# Altium PCB MB1189.PcbDoc (part 3 of 3)
Units mil, origin at the board's own origin, x right, y up, seen from the top; angles counter-clockwise.
Board outline 3826.77 x 2234.25 mil, 6 copper layers (Top Layer, GND_TOP, Internal Signal 1, VCC, Internal Signal 2, Bottom Layer), stack 62.65 mil thick; 150 components, 157 nets, 740 pads, 457 vias.
Unrouted connection lines stored in the file: 6.
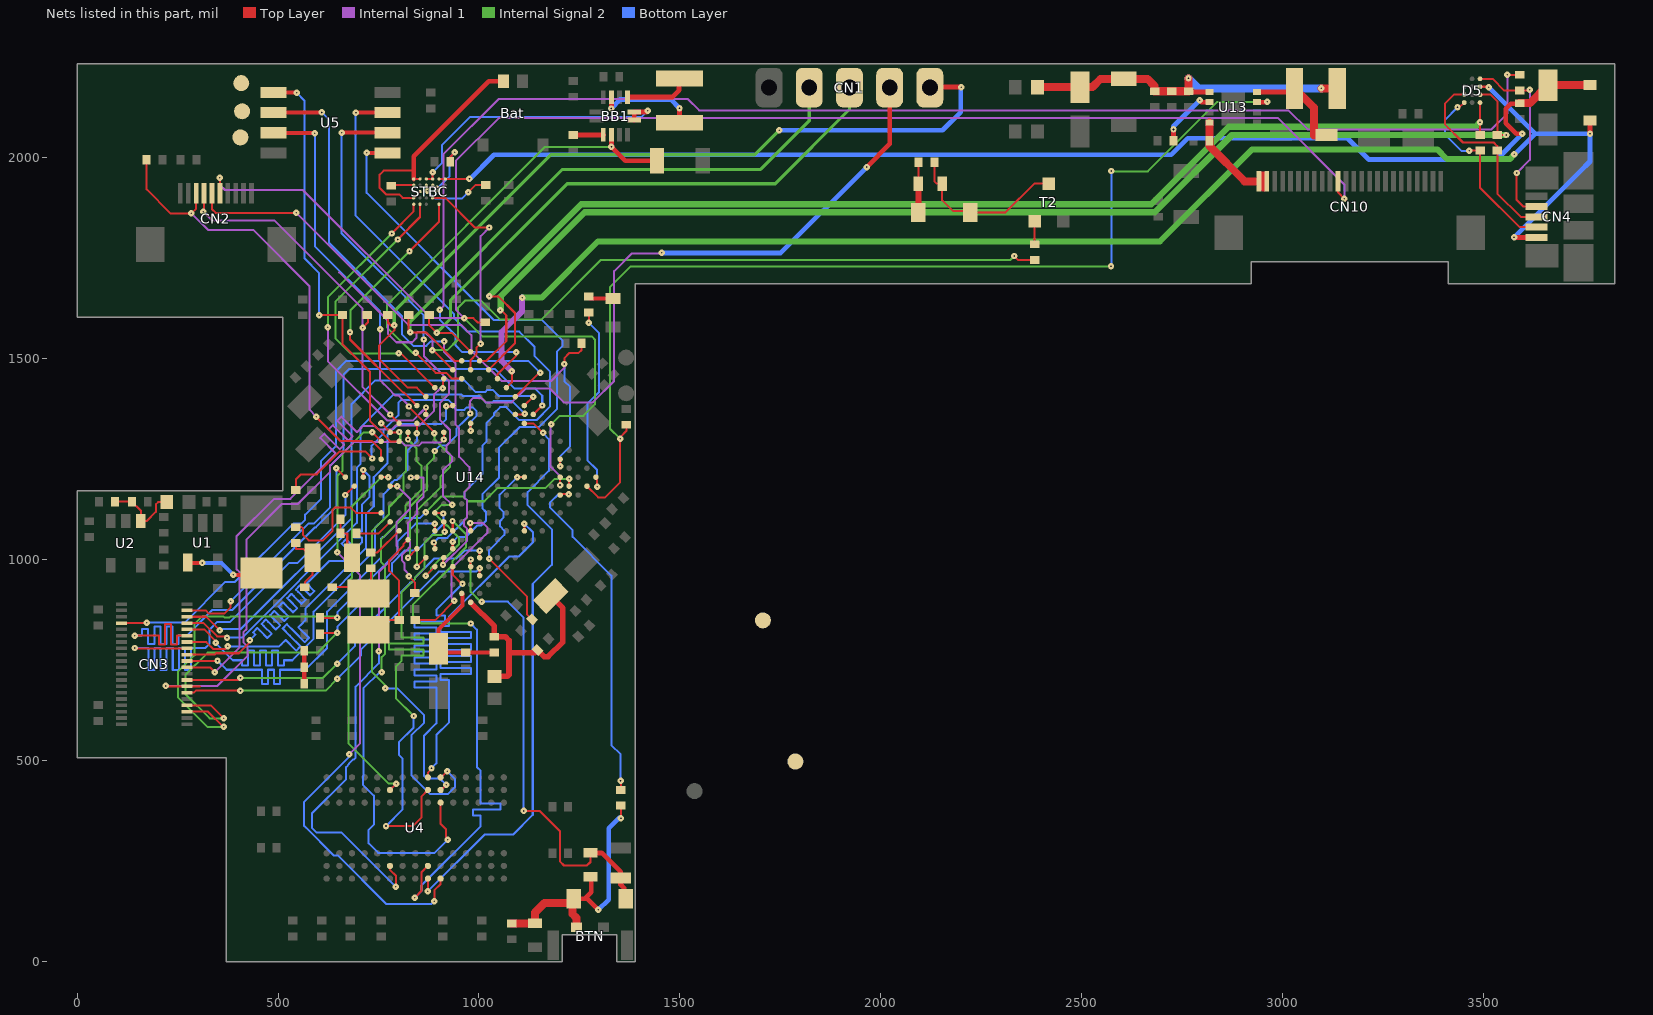
[diagram p7: the nets of this part, all layers, seen from the top]

## Via types
v1: diameter 16, hole 4, Top Layer to Bottom Layer, 457 vias

## Nets (pads, with @x,y where several pads share a name; then routed paths per layer and width w, separated by ;. In a path a pad name is that pad's centre, name@x,y a point inside that pad or via, vN(x,y) a via of type N, cw(c..) or ccw(c..) an arc to the next point about the centre after c; other vN are vias at no path point) (continued)
HREF: CN3.15 U14.N4 | length 893.2
  Top Layer w5: CN3.15@273.82,700.79 401.25,700.79 v1(406.5,706.04) ; U14.N4@1001.6,1005.27 1001.6,1015.01 v1(1001.6,1023.01)
  Internal Signal 2 w5: v1(406.5,706.04) 611.94,706.04 v1(647.64,741.73)
  Bottom Layer w5: v1(647.64,741.73) 691.93,786.02 691.93,806.6 828.54,943.21 832.25,943.21 841.33,952.29 841.33,956 888.08,1002.75 943.7,1002.75 963.96,1023.01 v1(1001.6,1023.01)
I2C1_SCL: CN2.4 R140.2 U14.A7 | length 903.9
  Top Layer w5: v1(313.98,1866.14) 315.94,1868.11 CN2.4@315.94,1912.4 ; v1(710.63,1577.76) 723.43,1590.55 723.43,1606.97 R140.2@721.45,1608.94 ; v1(778.89,1361.61) U14.A7@801.16,1339.34
  Internal Signal 1 w5: v1(313.98,1866.14) 335.63,1844.49 490.88,1844.49 710.63,1624.74 v1(710.63,1577.76) 710.63,1429.87 v1(778.89,1361.61)
I2C2_SDA: CN2.3 R142.2 U14.B4 | length 1185.9
  Top Layer w5: R142.2@172.92,1996.07 172.92,1921.57 232.28,1862.2 v1(284.45,1862.2) 296.26,1874.02 CN2.3@296.26,1912.4 ; v1(595.5,1356.37) 595.5,1355.29 655.51,1295.28 734.25,1295.28 756.62,1272.91 U14.B4@756.62,1250.25
  Internal Signal 1 w5: v1(284.45,1862.2) 325.79,1820.87 437.99,1820.87 578.74,1680.12 578.74,1375.04 577.78,1374.08 v1(595.5,1356.37)
K: CN10.1 CN10.2 R58.2 U13.4 | length 267.7
  Top Layer w20: U13.4@2817.91,2087.6 2817.91,2029.53 2905.51,1941.93 CN10.1@2940.94,1941.93 2949.8,1950.79 2949.8,1956.69 2950.79,1956.69 2950.79,1927.17 2951.77,1926.18
LCD_BL_CTRL: R118.1 U13.7 U14.R14 | length 2638.9
  Top Layer w5: U14.R14@1268.85,1183.44 1296.78,1155.51 1313.98,1155.51 1351.38,1192.91 v1(1351.38,1301.18) 1351.38,1305.12 1367.13,1320.87 R118.1@1367.13,1335.94
  Top Layer w12: U13.7@2936.02,2138.78 2960.63,2138.78 v1(2961.61,2139.76)
  Internal Signal 2 w5: v1(1351.38,1301.18) 1325.79,1326.77 1325.79,1678.15 1377.95,1730.32 v1(2572.83,1730.32) ; v1(2573.82,1967.52) 2574.8,1966.54 2664.37,1966.54 2837.6,2139.76 v1(2961.61,2139.76)
  Bottom Layer w5: v1(2572.83,1730.32) 2573.82,1731.3 v1(2573.82,1967.52)
LCD_INT: CN2.5 R36.2 U14.M14 | length 1512.5
  Top Layer w5: CN2.5@335.63,1912.4 335.63,1872.05 344.49,1863.19 v1(545.28,1863.19) ; v1(1202.04,1232.51) 1202.04,1240.51 U14.M14@1202.04,1250.25 ; v1(1212.66,1487.28) 1212.66,1501.91 1212.6,1501.97 1225.39,1514.76 1248.03,1514.76 1255.23,1521.96 R36.2@1255.23,1539.37
  Internal Signal 1 w5: v1(545.28,1863.19) 823.82,1584.65 955.71,1584.65 981.3,1559.06 981.3,1519.95 1056.36,1444.88 1180.12,1444.88 1212.66,1477.42 v1(1212.66,1487.28)
  Bottom Layer w5: v1(1202.04,1232.51) 1202.04,1257.16 1227.11,1282.23 1227.11,1430.37 1212.66,1444.82 v1(1212.66,1487.28)
LCD_RST: CN2.6 CN10.11 R34.2 U14.N13 | length 4488.5
  Top Layer w5: CN2.6@355.31,1912.4 v1(355.31,1950.79) ; v1@961.62,1603.34 v1(963.58,1601.38) 986.22,1601.38 997.05,1590.55 1015.07,1590.55 R34.2@1015.74,1591.23 ; v1(1201.77,1186.02) 1202.04,1186.29 U14.N13@1202.04,1205.71 ; CN10.11@3137.79,1941.93 3137.79,1914.37 v1(3153.54,1898.62)
  Internal Signal 1 w5: v1(355.31,1950.79) 355.31,1933.07 368.11,1920.28 562.01,1920.28 880.91,1601.38 v1(963.58,1601.38) 942.47,1622.49 942.47,1992.57 1048.77,2098.86 2988.63,2098.86 3153.54,1933.95 v1(3153.54,1898.62) ; v1(1180.38,1337.34) 1178.21,1335.16 1178.21,1231.3 1201.77,1207.73 v1(1201.77,1186.02)
  Internal Signal 2 w5: v1(963.58,1601.38) 1009.84,1555.12 1281.5,1555.12 1288.39,1548.23 1288.39,1386.81 1259.84,1358.27 1201.31,1358.27 v1(1180.38,1337.34)
LED1: R2.1 U14.R15 | length 490.5
  Top Layer w5: v1(1273.62,1589.57) R2.1@1273.63,1615.47 ; U14.R15@1291.13,1205.71 1294.29,1202.54 v1(1294.29,1182.09)
  Bottom Layer w5: v1(1273.62,1589.57) 1298.23,1564.96 1298.23,1416.34 1269.69,1387.8 1269.69,1248.03 1294.29,1223.43 v1(1294.29,1182.09)
MICROAB_N: D5.D3 R160.2 U14.C15 | length 2974.9
  Top Layer w5: U14.C15@1023.87,1472.96 1089.62,1538.71 1089.62,1614.17 1048.29,1655.51 v1(1025.59,1655.51)
  Top Layer w6: R160.2@3491.15,2057.4 v1(3491.15,2088.58) D5.D3@3491.14,2137.8
  Internal Signal 2 w16: v1(1025.59,1655.51) 1254.92,1884.84 2673.23,1884.84 2866.14,2077.76 3480.32,2077.76 v1(3491.15,2088.58)
MICROAB_P: D5.C3 R159.2 U14.B15 | length 3029.4
  Top Layer w5: U14.B15@1001.6,1495.23 1018.85,1495.23 1067.91,1544.29 1067.91,1608.37 1055.22,1621.06 v1(1053.15,1621.06) ; D5.C3@3491.14,2157.48 3517.72,2157.48 3534.45,2140.74 R159.2@3534.45,2057.4 3555.79,2057.4 v1(3556.1,2057.09)
  Internal Signal 2 w16: v1(1053.15,1621.06) 1054.13,1622.05 1054.13,1655.77 1263.21,1864.84 2681.51,1864.84 2873.76,2057.09 v1(3556.1,2057.09)
NetBAT_1: Bat.1 STBC.A2 STBC.A5 STBC.B3 STBC.B5 | length 612
  Top Layer w4: STBC.A2@837.6,1900.59 STBC.B3@853.35,1916.34
  Top Layer w5: STBC.A2@837.6,1900.59 810.04,1900.59 801.18,1909.45 768.7,1909.45 752.95,1925.2 752.95,1958.66 762.8,1968.5 837.6,1968.5 ; STBC.A5@837.6,1947.83 STBC.B5@853.35,1947.83
  Top Layer w12: STBC.A5@837.6,1947.83 837.6,1968.5 837.6,2003.94 1024.49,2190.83 Bat.1@1061.02,2190.83
NetBB1_1: BB1.1 L6.2 | length 165.4
  Top Layer w12: BB1.1@1369.57,2151.33 1481.06,2151.33 1498.03,2168.31 1498.03,2196.85 L6.2@1499.02,2197.83
NetBB1_3: BB1.3 L6.1 | length 253.7
  Top Layer w12: v1(1328.74,2123.03) 1329.57,2123.86 BB1.3@1329.57,2151.33 ; L6.1@1499.02,2087.6 v1(1499.02,2124.02)
  Bottom Layer w12: v1(1328.74,2123.03) 1351.38,2145.67 1477.36,2145.67 v1(1499.02,2124.02)
NetBB1_7: BB1.7 C1.1 | length 74.4
  Top Layer w12: C1.1@1235.24,2057.46 1309.44,2057.46 BB1.7@1309.57,2057.33
NetBB1_11: BB1.11 BB1.12 STBC.C5 STBC.D5 | length 711.9
  Top Layer w5: STBC.C5@869.09,1947.83 STBC.D5@884.84,1947.83 v1(884.84,1964.57)
  Top Layer w12: BB1.11@1386.57,2094.33 BB1.12@1386.57,2114.33 1417.48,2114.33 v1(1420.28,2117.13)
  Bottom Layer w5: v1(884.84,1964.57) 908.46,1988.19 908.46,2032.48 978.35,2102.36 1405.51,2102.36 v1(1420.28,2117.13)
NetBTN_1: BTN.1 D2.1 R8.1 R10.1 R18.1 R19.1 | length 688
  Top Layer w5: v1@1353.35,357.28 R8.1@1353.35,388.11
  Top Layer w12: D2.1@1236.22,156.5 1262.8,156.5 ; R18.1@1277.56,211.61 1279.53,209.65 1279.53,173.23 1262.8,156.5 ; v1(1297.24,128.94) 1269.68,156.5 1262.8,156.5
  Top Layer w20: R19.1@1081.69,95.16 1139.45,95.16 R10.1@1139.76,95.47 1139.76,122.05 1163.39,145.67 1225.39,145.67 D2.1@1232.28,152.56 ; D2.1@1236.22,156.5 D2.1@1232.28,152.56 ; BTN.1@1243.11,85.16 1243.11,108.27 1232.28,119.09 D2.1@1232.28,152.56
  Bottom Layer w12: v1(1297.24,128.94) 1322.83,154.53 1322.83,331.69 1348.43,357.28 v1(1353.35,357.28)
NetC3_1: C3.1 R6.1 R7.2 | length 82.2
  Top Layer w12: R6.1@565.27,690.94 C3.1@565.27,732.03 R7.2@565.27,773.12
NetC14_1: C14.1 D1.1 T2.3 VM.2 | length 418.9
  Top Layer w5: C14.1@2133.24,1989.17 2133.24,1941.56 2138.78,1936.02 VM.2@2152.56,1936.02 2152.56,1894.69 2179.13,1868.11 2218.5,1868.11 D1.1@2222.44,1864.17 2310.04,1864.17 2381.97,1936.1 T2.3@2418.31,1936.1 T2.3@2418.23,1936.02
NetC14_2: C14.2 D1.2 VM.1 | length 125.2
  Top Layer w5: VM.1@2093.5,1936.02 2093.87,1936.39 C14.2@2093.87,1989.17
  Top Layer w15: D1.2@2093.44,1864.17 2093.5,1864.24 VM.1@2093.5,1936.02
NetC21_1: C21.1 C22.1 L7.1 U2.1 | length 195.4
  Top Layer w5: C22.1@93.87,1144.69 C21.1@136.44,1144.69 158.46,1122.66 U2.1@158.46,1096.46 173.23,1096.46 195.87,1119.09 195.87,1137.8 201.77,1143.7 L7.1@223.43,1143.7
NetC76_1: C76.1 U14.L11 | length 462.1
  Top Layer w5: v1(1025.32,1002.89) 1120.08,908.13 1120.08,863.71 C76.1@1132.15,851.64 ; v1(1095.21,1205.71) 1103.21,1205.71 U14.L11@1112.96,1205.71
  Bottom Layer w5: v1(1025.32,1002.89) 1025.32,1024.11 1062.99,1061.78 1062.99,1072.63 1052.56,1083.06 1052.56,1096.6 1061.64,1105.68 1061.64,1118.52 1051.48,1128.68 1051.48,1161.98 v1(1095.21,1205.71)
NetC85_1: C85.1 R131.2 X2.2 | length 162
  Top Layer w5: C85.1@634.84,931.72 710.02,931.72 X2.2@725.39,916.34 731.29,922.24 R131.2@731.29,979.02
NetC93_1: C93.1 R132.1 X3.1 | length 145.8
  Top Layer w5: R132.1@544.3,1041.65 544.3,1027.55 545.28,1026.57 563.98,1026.57 X3.1@585.63,1004.92 585.63,962.6 566.93,943.9 C93.1@566.93,931.72
NetC94_1: C94.1 R133.1 X3.2 | length 117.2
  Top Layer w5: C94.1@655.88,1101.38 655.88,1066 R133.1@655.82,1065.94 671.26,1065.94 672.24,1064.96 672.24,1016.73 X3.2@684.06,1004.92
NetC96_1: C96.1 U14.E11 | length 709
  Top Layer w5: C96.1@544.29,1173.6 544.29,1199.8 557.09,1212.6 596.46,1212.6 653.54,1269.69 716.63,1269.69 v1(734.29,1252.03) ; v1(979.33,1321.59) U14.E11@979.33,1339.34
  Bottom Layer w5: v1(734.29,1252.03) 732.78,1253.54 732.78,1283.96 762.12,1313.3 762.12,1322.16 799.21,1359.25 799.21,1390.75 805.92,1397.46 924.77,1397.46 933.85,1388.38 933.85,1383.08 943.9,1373.03 950.51,1373.03 950.64,1372.9 963.48,1372.9 970.06,1379.49 970.76,1378.79 971.47,1379.49 984.31,1379.49 993.39,1370.41 993.39,1357.57 979.33,1343.51 v1(979.33,1321.59)
NetCN1_1: CN1.1 R3.1 U14.A10 | length 2082.4
  Top Layer w5: R3.1@773.63,1608.94 773.63,1590.55 780.51,1583.66 v1(789.37,1583.66) 789.37,1570.87 750.98,1532.48 750.98,1500 822.56,1428.42 845.7,1428.42 U14.A10@867.97,1406.15
  Top Layer w12: CN1.1@2122.05,2175.2 2123.03,2176.18 v1(2199.8,2176.18)
  Internal Signal 2 w8: v1(789.37,1583.66) 789.37,1618.11 1179.13,2007.87 1686.02,2007.87 v1(1747.05,2068.9)
  Bottom Layer w12: v1(1747.05,2068.9) 2153.54,2068.9 2198.82,2114.17 2198.82,2175.2 v1(2199.8,2176.18)
NetCN4_2: CN4.2 D5.D1 R160.1 | length 481.8
  Top Layer w5: v1(3435.04,2125.98) 3439.96,2125.98 D5.D1@3451.77,2137.8 D5.D1@3452.08,2137.49 ; v1(3464.57,2017.72) 3464.88,2018.03 R160.1@3491.15,2018.03 3491.15,1926.19 3589.57,1827.76 CN4.2@3631.5,1827.76
  Top Layer w6.59: CN4.2@3629.53,1825.79 CN4.2@3631.5,1827.76
  Bottom Layer w5: v1(3435.04,2125.98) 3404.53,2095.47 3404.53,2058.07 3444.88,2017.72 v1(3464.57,2017.72)
NetCN4_3: CN4.3 D5.C1 R159.1 | length 501.3
  Top Layer w5: D5.C1@3451.77,2157.48 3426.18,2157.48 3403.54,2134.84 3403.54,2083.66 3448.82,2038.39 3525.59,2038.39 3534.45,2029.52 R159.1@3534.45,2018.03 3534.45,1911.41 3592.52,1853.35 CN4.3@3631.5,1853.35
NetCN4_4: CN4.4 D5.A3 R161.1 | length 481.8
  Top Layer w5: D5.A3@3491.14,2196.85 3522.64,2196.85 3551.86,2167.63 R161.1@3589.57,2167.63 3613.5,2167.63 v1(3615.16,2169.29) ; v1(3582.68,1962.6) 3581.69,1961.61 3581.69,1896.65 3599.41,1878.94 CN4.4@3631.5,1878.94
  Top Layer w8: CN4.4@3630.51,1879.92 CN4.4@3631.5,1878.94
  Internal Signal 1 w5: v1(3582.68,1962.6) 3615.16,1995.08 v1(3615.16,2169.29)
NetL3_1: L3.1 U1.4 | length 197.7
  Top Layer w10: U1.4@275.59,993.11 276.57,992.13 v1(311.02,992.13) ; v1(388.78,962.6) 453.74,962.6 L3.1@458.66,967.52
  Bottom Layer w10: v1(311.02,992.13) 359.25,992.13 v1(388.78,962.6)
NetL4_2: L4.2 U13.8 Z1.1 | length 234.3
  Top Layer w12: U13.8@2936.02,2164.37 3020.67,2164.37 L4.2@3029.53,2173.23
  Top Layer w20: L4.2@3029.53,2173.23 3077.76,2125 3077.76,2056.1
NetLD1_2: LD1.2 R2.2 | length 61.8
  Top Layer w10: R2.2@1273.63,1654.84 1277.87,1650.59 LD1.2@1333.66,1650.59
NetR8_2: R8.2 U14.P12 | length 865.3
  Top Layer w5: U14.P12@1202.04,1161.17 1204.42,1163.55 v1(1223.32,1163.55) ; v1(1352.36,449.8) 1353.35,448.81 R8.2@1353.35,427.48
  Bottom Layer w5: v1(1223.32,1163.55) 1198,1163.55 1177.17,1142.72 1177.17,1129.92 1233.27,1073.82 1233.27,1057.09 1329.72,960.63 1329.72,538.39 1352.36,515.75 v1(1352.36,449.8)
NetR31_1: R31.1 T2.1 | length 57.2
  Top Layer w5: R31.1@2382.87,1785.12 T2.1@2382.87,1842.36
NetR59_1: R59.1 U13.2 | length 154.1
  Top Layer w12: R59.1@2728.04,2043.3 2728.35,2043.61 v1(2728.35,2070.87) ; v1(2793.31,2143.7) 2798.23,2138.78 U13.2@2817.91,2138.78
  Bottom Layer w12: v1(2728.35,2070.87) 2728.35,2078.74 v1(2793.31,2143.7)
NetR122_2: R122.2 U14.L5 | length 407.5
  Top Layer w5: R122.2@841.54,849.72 891.06,849.72 v1(938.98,897.64) ; v1(978.35,1091.54) 978.35,1082.81 979.33,1081.83 U14.L5@979.33,1072.08
  Internal Signal 1 w5: v1(938.98,897.64) 931.1,905.51 931.1,977.36 1008.12,1054.38 1008.39,1054.38 1020.67,1066.66 1020.67,1080.71 1009.84,1091.54 v1(978.35,1091.54)
NetR149_1: R149.1 U14.E5 | length 374.2
  Top Layer w5: v1(825.83,958.71) 840.55,943.99 R149.1@840.55,917.01 ; v1(830.75,1204.78) 844.78,1204.78 U14.E5@845.7,1205.71
  Internal Signal 1 w5: v1(825.83,958.71) 825.83,964.28 814.71,975.39 814.71,991.66 807.93,998.44 807.93,1011.69 819.27,1023.02 828.35,1032.1 828.35,1044.94 823.82,1049.47 823.82,1092.52 845.47,1114.17 845.47,1140.75 862.15,1157.42 862.15,1204.78 v1(830.75,1204.78)
NetR161_2: R161.2 U14.D15 | length 3618.1
  Top Layer w5: U14.D15@1046.14,1450.69 1046.14,1461.5 1092.57,1507.93 v1(1092.57,1516.81) ; v1(3559.06,2206.69) 3559.37,2207 R161.2@3589.57,2207
  Internal Signal 1 w5: v1(902.56,1622.05) 911.42,1630.91 911.42,2008.86 1049.21,2146.65 1519.69,2146.65 1547.85,2118.48 3014.39,2118.48 3062.01,2070.87 3519.69,2070.87 3559.06,2110.24 v1(3559.06,2206.69)
  Bottom Layer w5: v1(902.56,1622.05) 902.56,1597.44 941.56,1558.44 941.56,1533.36 958.11,1516.81 v1(1092.57,1516.81)
NetRdiv1_2: Rdiv1.2 STBC.C4 | length 182.5
  Top Layer w5: STBC.C4@869.09,1932.09 869.09,1920.41 v1(871.11,1918.4) ; v1(973.47,1914.46) 991.77,1932.76 Rdiv1.2@1016.74,1932.76
  Bottom Layer w5: v1(871.11,1918.4) 890.88,1898.62 957.63,1898.62 v1(973.47,1914.46)
NetRpre_2: Rpre.2 STBC.D4 | length 152
  Top Layer w5: STBC.D4@884.84,1932.09 893.7,1923.23 v1(895.67,1923.23) ; Rpre.2@928.46,1990.15 928.46,2002.33 v1(940.01,2013.88)
  Bottom Layer w5: v1(895.67,1923.23) 927.17,1954.72 927.17,2001.04 v1(940.01,2013.88)
NetRset_1: Rset.1 STBC.A4 | length 56.6
  Top Layer w5: Rset.1@781.49,1930.79 782.79,1932.09 STBC.A4@837.6,1932.09
NetTP3_1: TP3.1 U4.J1 U14.H14 | length 1450.9
  Top Layer w5: v1(873.03,175.2) U4.J1@873.03,206.69 ; U14.H14@1112.96,1339.34 1135.19,1339.34 1158.52,1316.01 v1(1159.51,1316.01)
  Bottom Layer w5: v1(873.03,175.2) 1013.78,315.94 1084.65,315.94 1133.86,365.16 1133.86,939.96 1181.41,987.51 1181.41,1075.48 1121.06,1135.83 1121.06,1168.31 1174.21,1221.46 1174.21,1300.32 1159.51,1315.02 v1(1159.51,1316.01)
NRST: CN1.2 U14.J1 | length 2139.7
  Top Layer w5: v1(823.43,1005.27) U14.J1@845.7,1027.54
  Top Layer w12: v1(1964.57,1977.36) 2022.05,2034.84 CN1.2@2022.05,2175.2
  Internal Signal 1 w5: v1(977.89,1363.99) 977.89,1395.21 985.06,1402.38 1006.47,1402.38 1017.12,1391.73 1081.69,1391.73 1116.14,1426.18 1176.18,1426.18 1210.63,1391.73 1283.46,1391.73 1336.61,1444.88 1336.61,1718.5 1380.91,1762.8 v1@1452.76,1762.8
  Internal Signal 2 w5: v1(823.43,1005.27) 828.35,1010.18 828.35,1132.12 870.44,1174.21 870.22,1174.43 870.22,1235.1 887.8,1252.68 887.8,1268.72 v1(889.81,1270.73)
  Bottom Layer w5: v1(889.81,1270.73) 902.9,1283.82 918.94,1283.82 943.9,1308.78 943.9,1325.81 957.72,1339.63 ; 957.74,1339.63 973.43,1355.32 973.43,1359.53 v1(977.89,1363.99)
  Bottom Layer w12: v1(1454.72,1763.78) 1750.98,1763.78 v1(1964.57,1977.36)
PB6: R55.1 U5.1 U14.B6 | length 1078.2
  Top Layer w5: v1(602.36,1608.27) 603.04,1608.94 R55.1@660.44,1608.94 660.44,1536.41 728.35,1468.5 728.35,1345.69 779.24,1294.79 U14.B6@801.16,1294.79
  Top Layer w10: U5.1@489.17,2162.6 489.37,2162.4 v1(546.26,2162.4)
  Bottom Layer w5: v1(546.26,2162.4) 565.94,2142.72 565.94,1750 602.36,1713.58 v1(602.36,1608.27)
PC0: TP2.1 U4.K8 U14.M2 | length 1358.8
  Top Layer w5: U4.K8@904.53,427.17 905.51,427.17 v1(918.31,439.96) ; U14.M2@934.79,983 934.79,962.65 956.6,940.84 v1(959.04,940.84)
  Bottom Layer w5: 863.17,524.09 863.17,536.93 ; 863.19,524.07 863.19,462.24 869.6,455.82 902.44,455.82 v1(918.31,439.96) v1@920.2,441.85 ; 863.19,536.95 863.19,562.01 894.22,593.04 894.22,679.13 894.22,681.59 839.32,681.59 839.32,696.59 894.22,696.59 894.22,711.59 839.32,711.59 839.32,726.59 894.22,726.59 894.22,741.59 839.32,741.59 839.32,756.59 894.22,756.59 894.22,771.59 839.32,771.59 839.32,786.59 894.22,786.59 894.22,801.59 839.32,801.59 839.32,816.59 894.22,816.59 894.22,831.59 839.32,831.59 839.32,846.59 894.22,846.59 915.2,846.59 915.2,861.59 894.22,861.59 894.22,869.09 894.22,875.26 959.04,940.08 v1(959.04,940.84)
PC14: R132.2 U14.E1 | length 305.7
  Top Layer w5: R132.2@544.3,1081.02 558.75,1081.02 562.68,1077.08 562.68,1061.33 575.92,1048.1 612.07,1048.1 635.83,1071.85 635.83,1125 640.75,1129.92 681.1,1129.92 694.4,1116.63 U14.E1@756.62,1116.63
PC15: R133.2 U14.F1 | length 95.5
  Top Layer w5: R133.2@695.19,1065.94 750.48,1065.94 U14.F1@778.89,1094.35
PCLK: CN3.11 U14.P3 | length 882.3
  Top Layer w5: CN3.11@273.82,669.29 290.1,669.29 295.35,674.54 v1(406.5,674.54) ; U14.P3@1001.6,960.73 1001.6,970.47 v1(1001.6,978.47)
  Internal Signal 2 w5: v1(406.5,674.54) 618.63,674.54 v1(647.64,703.54)
  Bottom Layer w5: v1(647.64,703.54) 706.69,762.6 706.69,777.52 899.64,970.47 993.6,970.47 v1(1001.6,978.47)
PE0: U4.K9 U14.A6 | length 1245.9
  Top Layer w5: v1(756.62,1339.34) U14.A6@778.89,1317.06 800.31,1317.06 v1(801.22,1317.98) ; U4.K9@904.53,458.66 906.5,458.66 v1(921.26,473.43)
  Internal Signal 2 w5: v1(766.73,680.12) 766.73,687.99 733.27,721.46 733.27,1070.87 776.11,1113.71 776.11,1131.42 812.14,1167.45 812.14,1189.86 812.01,1189.99 812.01,1214.32 818.69,1221 818.69,1282.14 804.13,1296.7 804.13,1315.06 v1(801.22,1317.98)
  Bottom Layer w5: v1(766.73,680.12) 796.26,680.12 863.71,612.67 863.71,594.64 831.91,562.84 831.91,463.37 877.95,417.32 923.23,417.32 939.96,434.06 939.96,454.72 v1(921.26,473.43) v1@925.42,477.59
PE1: U4.K1 U14.A5 | length 1611.5
  Top Layer w5: v1(734.35,1317.07) U14.A5@756.62,1294.79 ; v1(888.78,150.59) 888.78,177.43 904.53,193.18 U4.K1@904.53,206.69
  Internal Signal 1 w5: v1(647.64,1018.7) 703.74,962.6 703.74,542.32 v1(677.2,515.77)
  Internal Signal 2 w5: v1(647.64,1018.7) 647.64,1208.44 660.76,1221.56 660.76,1264.11 713.72,1317.07 v1(734.35,1317.07)
  Bottom Layer w5: v1(677.2,515.77) 680.12,512.85 564.96,397.7 564.96,337.86 568.65,334.18 568.65,333.91 638.03,264.53 648.14,264.53 768.72,143.95 882.14,143.95 v1(888.78,150.59)
PF6: U5.7 U14.K2 | length 1677.6
  Top Layer w5: v1(888.01,1043.05) 888.01,1039.52 890.25,1037.28 U14.K2@890.25,1027.54
  Top Layer w10: v1(693.9,2112.2) 694.29,2112.6 U5.7@772.64,2112.6
  Bottom Layer w5: v1(693.9,2112.2) 692.91,2111.22 692.91,1856.3 937.99,1611.22 937.99,1600.89 970.96,1567.91 1100.39,1567.91 1138.78,1529.53 1138.78,1506.62 1177.17,1468.24 1177.17,1381.62 1143.23,1347.69 1100.41,1347.69 1068.42,1379.69 1052.91,1379.69 1037.2,1363.98 1037.2,1358.8 1018.45,1340.05 1018.45,1294.25 1008.37,1284.17 1008.37,1213.1 972.56,1177.28 972.56,1177.02 963.83,1168.29 963.83,1154.75 970.47,1148.1 970.47,1105.58 962.85,1097.96 962.85,1095.96 921.27,1054.38 899.35,1054.38 v1(888.01,1043.05)
PF7: U5.3 U14.K1 | length 1394.8
  Top Layer w5: v1(825.81,1381.5) 825.81,1380.44 888.82,1317.43 v1(888.82,1315.02) ; v1(845.7,983) U14.K1@867.98,1005.27
  Top Layer w10: U5.3@489.17,2062.6 589.96,2062.6 v1(591.54,2061.02)
  Internal Signal 1 w5: v1(753.94,1573.82) 753.94,1446.85 764.94,1435.84 765.32,1435.84 774.4,1426.77 774.4,1426.39 792.07,1408.71 800.93,1408.71 828.15,1381.5 v1(825.81,1381.5)
  Internal Signal 2 w5: v1(845.7,983) 845.7,1121.5 904.53,1180.33 904.53,1207.68 928.15,1231.3 928.15,1260.83 888.82,1300.15 v1(888.82,1315.02)
  Bottom Layer w5: v1(591.54,2061.02) 591.54,1780.51 753.94,1618.11 v1(753.94,1573.82)
PF8: TP6.1 U5.5 U14.L3 | length 1476.4
  Top Layer w5: U14.L3@934.79,1027.54 934.79,1037.28 v1(934.79,1045.28)
  Top Layer w10: v1(720.47,2012.8) 772.44,2012.8 U5.5@772.64,2012.6
  Bottom Layer w5: v1(720.47,2012.8) 720.47,1913.39 1037.4,1596.46 1157.48,1596.46 1207.68,1546.26 1207.68,1531.5 1194.63,1518.45 1194.63,1375.83 1148.99,1330.18 1100.85,1330.18 1050.2,1279.53 1050.2,1204.72 1008.37,1162.9 1008.37,1127.95 1017.47,1118.85 1017.47,1097.19 1005.66,1085.38 995.55,1085.38 966.57,1056.4 945.91,1056.4 v1(934.79,1045.28)
PF9: TP7.1 U5.2 U14.L2 | length 1516.6
  Top Layer w5: v1(910.48,987.25) 910.48,1003.23 U14.L2@912.52,1005.27
  Top Layer w10: U5.2@489.17,2112.6 608.66,2112.6 v1(609.25,2113.19)
  Internal Signal 1 w5: v1(910.48,987.25) 970.47,1047.25 970.47,1076.77 962.85,1084.39 962.85,1097.96 970.47,1105.58 970.47,1148.1 963.83,1154.75 963.83,1167.59 976.38,1180.13 976.38,1230.58 950.79,1256.17 950.79,1327.76 941.11,1337.43 941.11,1489.26 913.39,1516.99 v1(913.39,1543.31)
  Bottom Layer w5: v1(609.25,2113.19) 626.97,2095.47 626.97,1788.39 809.06,1606.3 809.06,1560.04 836.61,1532.48 869.09,1532.48 879.92,1543.31 v1(913.39,1543.31)
PF10: TP5.1 U5.6 U14.L1 | length 1502.6
  Top Layer w5: v1(867.98,960.73) U14.L1@890.25,983
  Top Layer w10: v1(658.46,2062.99) 772.24,2062.99 U5.6@772.64,2062.6
  Internal Signal 1 w5: v1(862.2,1548.23) 863.19,1547.24 863.19,1506.29 925.64,1443.84 925.64,1412.84 902.85,1390.06 902.85,1348.13 928.02,1322.97 928.02,1292.9 919.29,1284.17 919.29,1270.63 933.07,1256.84 933.07,1245.08 910.43,1222.44 910.43,1159.45 v1(933.07,1136.81)
  Internal Signal 2 w5: v1(867.98,960.73) 881.28,974.03 881.28,979.98 904.06,1002.75 914.18,1002.75 950.29,1038.86 950.29,1054.36 929.87,1074.78 929.87,1076.3 920.79,1085.38 919.27,1085.38 893.7,1110.95 893.7,1123.48 907.03,1136.81 v1(933.07,1136.81)
  Bottom Layer w5: v1(658.46,2062.99) 658.46,1812.01 862.2,1608.27 v1(862.2,1548.23)
PF11: U4.J9 U14.P8 | length 1429.9
  Top Layer w5: U4.J9@873.03,458.66 873.03,470.47 882.7,480.14 881.93,480.9 v1(881.93,481.32) ; U14.P8@1112.96,1072.08 1112.96,1081.83 v1(1112.96,1089.83)
  Bottom Layer w5: v1(881.93,481.32) 894.17,493.56 894.17,563.98 925.2,595.01 925.2,698.82 925.2,700.77 904.22,700.77 904.22,715.77 925.2,715.77 980.1,715.77 980.1,730.77 925.2,730.77 904.22,730.77 904.22,745.77 925.2,745.77 980.1,745.77 980.1,760.77 925.2,760.77 904.22,760.77 904.22,775.77 925.2,775.77 980.1,775.77 980.1,790.77 925.2,790.77 904.22,790.77 904.22,805.77 925.2,805.77 980.1,805.77 980.1,820.77 925.2,820.77 904.22,820.77 904.22,835.77 925.2,835.77 925.2,850.77 925.2,858.27 1074.8,1007.87 1098.43,1007.87 1134.84,1044.29 1134.84,1067.94 v1(1112.96,1089.83)
PG15: U4.K7 U14.B7 | length 1444.6
  Top Layer w5: v1(823.43,1299.32) 823.43,1307.32 U14.B7@823.43,1317.06 ; U4.K7@904.53,395.67 904.53,342.52 918.25,328.8 918.25,307.14 v1(922.24,303.15)
  Internal Signal 2 w5: v1(757.87,720.47) 757.87,757.61 766.52,766.26 766.52,984.04 766.73,984.25 755.91,995.08 755.91,1049.45 816.69,1110.24 816.69,1134.61 856.68,1174.59 856.68,1234.4 844.49,1246.59 844.49,1278.26 v1(823.43,1299.32)
  Bottom Layer w5: v1(757.87,720.47) 752.95,720.47 712.6,680.12 712.6,462.09 711.9,461.39 711.9,439.47 738.28,413.09 738.28,341.02 725.39,328.14 725.39,294.29 749.02,270.67 889.76,270.67 v1(922.24,303.15)
PH0: R131.1 U14.G1 | length 92.1
  Top Layer w5: R131.1@731.29,1018.39 747.47,1018.39 U14.G1@801.16,1072.08
PH1: C83.1 U14.H1 X2.1 | length 315.5
  Top Layer w5: X2.1@725.39,825.79 749.39,849.78 C83.1@801.18,849.78 801.18,947.83 776.57,972.44 776.57,999.02 787.7,1010.14 787.95,1010.14 812.14,1034.33 812.14,1038.52 U14.H1@823.43,1049.81
PH2: U4.J2 U14.K4 | length 1470.7
  Top Layer w5: v1(840.55,159.45) 857.04,175.93 857.04,222.19 U4.J2@873.03,238.19 ; v1(934.1,1096.51) 934.79,1095.82 U14.K4@934.79,1072.08
  Internal Signal 2 w5: v1(934.1,1096.51) 934.55,1096.51 967.76,1063.3 967.76,1030.75 933.56,996.56 933.56,985.73 835.63,887.8 835.63,862.2 856.3,841.54 v1(979.33,841.54)
  Bottom Layer w5: v1(840.55,159.45) 857.53,176.43 857.53,190.7 1003.94,337.1 1003.94,356.3 1003.94,363.8 984.66,363.8 984.66,378.8 1003.94,378.8 1053.81,378.8 1053.81,393.8 1003.94,393.8 1003.94,399.61 1003.94,475.24 994.83,484.35 994.83,826.04 v1(979.33,841.54)
PH3: U4.J8 U14.J4 | length 1327.8
  Top Layer w5: v1(768.65,337.44) 835.47,337.44 857.28,359.25 857.28,411.42 U4.J8@873.03,427.17 ; U14.J4@912.52,1094.35 912.52,1071.74 v1(914.37,1069.88)
  Internal Signal 2 w5: v1(837.6,611.22) 793.31,655.51 793.31,734.25 807.09,748.03 807.09,761.48 861.99,761.48 861.99,776.48 807.09,776.48 776.73,776.48 776.73,791.48 807.09,791.48 861.99,791.48 861.99,806.48 807.09,806.48 807.09,813.98 807.09,918.05 841.33,952.29 841.33,956.49 864.17,979.33 864.17,1041.84 883.61,1061.27 905.76,1061.27 v1(914.37,1069.88)
  Bottom Layer w5: v1(768.65,337.44) 809.92,378.72 809.92,505.04 800.65,514.31 800.65,545.73 837.6,582.68 v1(837.6,611.22)
PI4: U4.F8 U14.C3 | length 914.7
  Top Layer w5: U14.C3@756.62,1205.71 766.36,1205.71 v1(774.36,1205.71) ; U4.F8@778.54,427.17 v1(794.42,443.05)
  Internal Signal 2 w5: v1(774.36,1205.71) 756.89,1205.71 684,1132.82 684,955.02 675.2,946.22 675.2,543.31 775.46,443.05 v1(794.42,443.05)
PI5: U4.F2 U14.D3 | length 1314
  Top Layer w5: U4.F2@778.54,238.19 778.54,228.43 793.92,213.06 793.92,186.63 v1(793.31,186.02) ; U14.D3@778.89,1183.44 788.64,1183.44 v1(796.64,1183.44)
  Internal Signal 1 w5: v1(751.02,772.68) 751.02,968.54 797.03,1014.55 797.03,1032.06 794.39,1034.71 794.39,1093.01 828.35,1126.97 828.35,1151.73 v1(796.64,1183.44)
  Bottom Layer w5: v1(751.02,772.68) 751.02,742.16 692.91,684.06 692.91,507.87 687.75,502.71 686.05,502.71 676.97,493.63 676.97,491.93 669.29,484.25 669.29,454.23 584.89,369.83 584.89,332.07 596.1,320.87 658.46,320.87 v1(793.31,186.02)
POWER_GOOD: BB1.8 R1.2 U14.B13 | length 1174
  Top Layer w5: v1(842.52,1514.76) 892.2,1465.08 918.48,1465.08 932.87,1450.69 U14.B13@957.06,1450.69
  Top Layer w12: BB1.8@1329.57,2057.33 1329.57,2027.72 v1(1329.72,2027.56) 1364.17,1993.11 R1.2@1442.91,1993.11
  Internal Signal 2 w5: v1(842.52,1514.76) 834.65,1514.76 770.67,1578.74 770.67,1633.86 1164.37,2027.56 v1(1329.72,2027.56)
SIO_CLK: CN3.7 R25.2 U14.H4 | length 1184.9
  Top Layer w5: CN3.7@273.82,637.8 332.31,637.8 364.79,605.32 v1(365.16,605.32) ; R25.2@604.64,815.29 607.47,818.11 v1(647.64,818.11) v1@647.83,817.92 ; U14.H4@890.25,1116.63 909.95,1116.63 v1(911.42,1115.16)
  Internal Signal 2 w5: v1(365.16,605.32) 329.72,605.32 269.68,665.35 269.68,713.58 324.8,768.7 598.23,768.7 v1(647.64,818.11)
  Bottom Layer w5: v1(647.64,818.11) 647.64,833.66 783.71,969.74 783.71,991.66 814.69,1022.64 844.98,1022.64 911.42,1089.08 v1(911.42,1115.16)
SIO_DAT: CN3.5 R24.2 U14.J3 | length 1244.3
  Top Layer w5: CN3.5@273.82,622.05 325.79,622.05 363.52,584.32 v1(365.16,584.32) ; R24.2@604.64,855.31 646.65,855.31 v1(647.64,856.3) v1@649.61,858.27 ; U14.J3@890.25,1072.08 890.25,1081.83 v1(890.25,1089.83)
  Internal Signal 2 w5: v1(365.16,584.32) 324.17,584.32 250.91,657.58 250.91,721.36 291.84,762.29 291.84,840.07 311.02,859.25 363.97,859.25 366.63,856.59 379.47,856.59 382.13,859.25 644.68,859.25 v1(647.64,856.3)
  Bottom Layer w5: v1(647.64,856.3) 647.64,869.82 797.03,1019.22 797.03,1044.63 842.23,1089.83 v1(890.25,1089.83)
STBC_CEN: STBC.B1 U14.A11 | length 719.3
  Top Layer w5: v1(797.44,1797.05) 853.35,1852.96 STBC.B1@853.35,1884.84 ; v1(800.2,1513.78) 804.89,1513.78 U14.A11@890.25,1428.42
  Internal Signal 2 w5: v1(797.44,1797.05) 642.56,1642.18 642.56,1551.5 680.28,1513.78 v1(800.2,1513.78)
STBC_CHG: STBC.E1 U14.A9 | length 663
  Top Layer w5: v1(679.13,1565.94) 679.13,1548.23 810.77,1416.59 812.99,1416.59 U14.A9@845.7,1383.88 ; v1(827.13,1767.35) 900.59,1840.81 STBC.E1@900.59,1884.84
  Internal Signal 2 w5: v1(679.13,1565.94) 680.12,1566.93 680.12,1620.34 v1(827.13,1767.35)
STBC_SD: STBC.A1 U14.B9 | length 815.7
  Top Layer w5: v1(782.59,1811.9) 837.6,1866.91 STBC.A1@837.6,1884.84 ; U14.B9@867.97,1361.61 868.11,1361.74 868.11,1378.96 v1(868.15,1379)
  Internal Signal 1 w5: v1(624.02,1578.74) 624.02,1494.56 772.47,1346.11 835.26,1346.11 v1(868.15,1379)
  Internal Signal 2 w5: v1(624.02,1578.74) 624.02,1605.08 623.78,1605.32 623.78,1653.09 v1(782.59,1811.9)
STBC_WAKEUP: STBC.D2 U14.B14 | length 544.4
  Top Layer w5: STBC.D2@884.84,1900.59 916.34,1900.59 990.07,1826.86 v1(1025.64,1826.86) ; U14.B14@979.33,1472.96 979.33,1497.15 993.72,1511.54 993.72,1527.18 v1(1003.94,1537.4)
  Internal Signal 1 w5: v1(1003.94,1537.4) 1003.94,1805.16 v1(1025.64,1826.86)
SWCLK: CN1.4 R5.2 U14.A14 | length 1511.6
  Top Layer w5: R5.2@824.81,1608.94 824.81,1569.88 v1(828.74,1565.94) 868.83,1565.94 939.54,1495.23 U14.A14@957.06,1495.23
  Internal Signal 2 w8: v1(828.74,1565.94) 828.74,1592.2 1207.99,1971.46 1700.79,1971.46 1822.05,2092.72 CN1.4@1822.05,2175.2
SWDIO: CN1.3 R4.1 U14.A15 | length 1495.1
  Top Layer w5: R4.1@875.99,1608.94 875.99,1583.67 v1(894.69,1564.96) 931.87,1564.96 U14.A15@979.33,1517.5
  Internal Signal 2 w8: v1(894.69,1564.96) 929.13,1599.4 929.13,1645.67 1219.49,1936.02 1737.2,1936.02 1922.05,2120.87 CN1.3@1922.05,2175.2
VBUS_FS1: CN4.1 D4.1 D5.B3 U14.E15 | length 3719.4
  Top Layer w5: U14.E15@1068.41,1428.42 1081.69,1441.7 v1(1081.69,1469.49) ; D5.B3@3491.14,2177.17 3511.81,2177.17 v1(3512.8,2176.18)
  Top Layer w12: v1(3575.79,1802.17) CN4.1@3631.5,1802.17 ; v1(3764.76,2060.04) D4.1@3764.76,2093.5
  Internal Signal 1 w15: v1(1081.69,1469.49) 1056.1,1495.08 1056.1,1566.93 1107.28,1618.11 v1(1107.28,1652.56)
  Internal Signal 2 w15: v1(1107.28,1652.56) 1156.5,1652.56 1296.26,1792.32 2694.88,1792.32 2924.04,2021.48 3384.71,2021.48 3408.98,1997.22 3565.13,1997.22 v1(3576.77,2008.86)
  Bottom Layer w12: v1(3512.8,2176.18) 3628.94,2060.04 ; v1(3575.79,1802.17) 3739.67,1966.04 3764.76,1991.14 v1(3764.76,2060.04) 3628.94,2060.04 ; v1(3576.77,2008.86) 3577.76,2008.86 3628.94,2060.04
VDDA: C65.1 C77.2 L5.2 R123.1 U14.R1 | length 559.6
  Top Layer w13.78: U14.R1@979.33,893.91 1038.38,834.86 R123.1@1038.38,808.44 1065.57,808.44 1074.8,799.21 1074.8,768.7 ; L5.2@1038.39,709.65 1070.87,709.65 1074.8,713.58 1074.8,768.7 ; C65.1@1178.54,909.84 1208.66,879.73 1208.66,795.28 1172.24,758.86 1162.37,758.86 C77.2@1145.65,775.57 1138.78,768.7 1074.8,768.7
VIBRATION_MOTOR: R31.2 U14.A13 | length 2132.5
  Top Layer w5: v1(883.86,1521.65) 886.1,1521.65 U14.A13@934.79,1472.96 ; v1(2331.69,1755.91) 2341.85,1745.75 R31.2@2382.87,1745.75
  Internal Signal 1 w5: 651.57,1714.57 653.54,1714.57 773.87,1594.24 773.87,1561.76 794.29,1541.34 833.66,1541.34 844.24,1551.92 844.24,1563.73 847.44,1566.93 865.42,1566.93 883.86,1548.5 v1(883.86,1521.65)
  Internal Signal 2 w5: v1(883.86,1521.65) 921.26,1521.65 947.83,1548.23 947.83,1626.97 966.54,1645.67 1004.92,1645.67 1053.15,1597.44 1154.53,1597.44 1303.15,1746.06 2321.85,1746.06 v1(2331.69,1755.91)
VL: C55.1 C56.1 C61.1 C63.2 C64.2 L1.2 L4.1 U13.1 | length 870
  Top Layer w12: C64.2@2765.75,2165.97 2767.35,2164.37 U13.1@2817.91,2164.37
  Top Layer w20: L1.2@2389.76,2176.18 C56.1@2496.06,2176.18 2526.57,2176.18 2547.28,2196.88 C61.1@2604.83,2196.88 ; C61.1@2604.86,2196.85 2663.39,2196.85 2681.1,2179.13 C55.1@2681.1,2165.97 C63.2@2723.43,2165.97 C64.2@2765.75,2165.97 v1(2765.75,2197.83) ; v1(3096.46,2173.23) L4.1@3135.83,2173.23
  Bottom Layer w20: v1(2765.75,2197.83) 2790.35,2173.23 v1(3096.46,2173.23)
VREF+: C78.2 C80.1 R123.2 U14.P1 | length 305.5
  Top Layer w10: U14.P1@957.06,916.18 958.66,914.58 958.66,885.83 899.61,826.77 C80.1@899.61,778.54 908.84,769.32 C78.2@967.52,769.32 1038.14,769.32 R123.2@1038.38,769.07
VSYNC: CN3.13 U14.D9 | length 1245.6
  Top Layer w5: v1(220.47,686.02) 221.46,685.04 CN3.13@273.82,685.04 306.1,685.04 ; v1(912.52,1299.32) 912.52,1307.32 U14.D9@912.52,1317.06
  Internal Signal 1 w5: v1(220.47,686.02) 349.41,686.02 424.21,760.83 424.21,784.74 423.72,784.74 414.64,793.82 414.64,820.64 421.76,827.76 421.76,1051.06 509.48,1138.78 549.21,1138.78 629.76,1219.33 629.76,1234.4 687.91,1292.55 808.28,1292.55 817.01,1283.82 850.04,1283.82 857.56,1291.34 904.53,1291.34 v1(912.52,1299.32)
VUSB: C23.1 C24.1 D4.2 STBC.E5 STBC.F5 | length 3108
  Top Layer w5: STBC.E5@900.59,1947.83 STBC.F5@916.34,1947.83 v1(976.38,1947.83)
  Top Layer w12: C23.1@3589.57,2136.2 3588.22,2134.84 3567.91,2134.84 3555.12,2122.05 3555.12,2086.61 3581.69,2060.04 v1(3596.46,2060.04)
  Top Layer w20: C23.1@3589.57,2136.2 3615.53,2136.2 C24.1@3660.43,2181.1 D4.2@3764.76,2181.1
  Bottom Layer w12: v1@976.87,1947.34 1037.4,2007.87 2722.44,2007.87 2763.78,2049.21 3161.42,2049.21 3214.57,1996.06 3532.48,1996.06 v1(3596.46,2060.04)
WAKEUP: C4.2 D2.2 R18.2 U14.N3 | length 1197.3
  Top Layer w5: U14.N3@979.33,983 979.33,992.74 v1(979.33,1000.74) ; v1(1111.22,375) 1150.59,375 1201.77,323.82 1201.77,249.02 1211.61,239.17 1268.7,239.17 1277.56,248.03 R18.2@1277.56,270.67
  Top Layer w12: R18.2@1277.56,270.67 1305.12,270.67 1352.34,223.45 C4.2@1352.34,208.3 1352.34,191.95 1361.22,183.07 1361.22,160.5 D2.2@1365.22,156.5
  Internal Signal 2 w5: v1(979.33,1000.74) 979.33,920.28 1003.89,895.71 v1(1006.94,895.71)
  Bottom Layer w5: v1(1006.94,895.71) 1071.81,895.71 1111.22,856.3 v1(1111.22,375)
XCLK: CN3.34 U14.F15 | length 1583.1
  Top Layer w5: CN3.34@110.04,842.52 172.24,842.52 v1(173.23,843.5) ; U14.F15@1090.69,1406.15 1150.09,1465.55 v1(1152.56,1465.55)
  Bottom Layer w5: v1(173.23,843.5) 267.72,843.5 369.09,944.88 392.98,944.88 538.95,1090.85 558.61,1090.85 567.69,1099.93 567.69,1112.25 577.24,1121.8 577.51,1121.8 607.28,1151.57 607.28,1246.06 643.7,1282.48 643.7,1468.5 670.28,1495.08 1123.03,1495.08 v1(1152.56,1465.55)
Y0: CN3.37 U14.H15 | length 1405.6
  Top Layer w5: CN3.37@273.82,874.02 319.61,874.02 327.49,866.14 365.86,866.14 381.89,882.17 v1(381.89,896.65) ; U14.H15@1135.23,1361.61 v1(1157.5,1383.88)
  Bottom Layer w5: v1(381.89,896.65) 576.04,1090.8 590.08,1090.8 629.76,1130.48 629.76,1234.4 663.39,1268.02 663.39,1461.61 676.81,1475.04 1039.72,1475.04 1088.6,1426.16 1139.76,1426.16 1157.5,1408.43 v1(1157.5,1383.88)
Y1: CN3.35 U14.G15 | length 1352
  Top Layer w5: CN3.35@273.82,858.27 321.22,858.27 v1(354.65,824.84) ; U14.G15@1112.96,1383.88 v1(1135.23,1406.15)
  Bottom Layer w5: v1(354.65,824.84) 357.53,827.72 407.45,827.72 683.03,1103.31 683.03,1387.76 741.58,1446.3 963.03,1446.3 991.89,1417.45 1015.6,1417.45 1021.14,1422.98 1034.42,1422.98 1049.92,1407.48 1133.9,1407.48 v1(1135.23,1406.15)
Y2: CN3.33 U14.G14 | length 1286.1
  Top Layer w5: CN3.33@273.82,842.52 315.05,842.52 348.23,809.34 370.15,809.34 v1(373.03,806.45) ; U14.G14@1090.69,1361.61 1112.59,1361.61 v1(1114.17,1363.19)
  Bottom Layer w5: v1(373.03,806.45) 410.79,806.45 696.11,1091.78 696.11,1229.41 704.96,1238.26 704.96,1328.98 787.53,1411.55 955.47,1411.55 959.57,1407.45 1001.4,1407.45 1016.87,1391.98 1033.98,1391.98 1036.68,1394.69 1082.68,1394.69 v1(1114.17,1363.19)
Y3: CN3.31 U14.B8 | length 1273.9
  Top Layer w5: CN3.31@273.82,826.77 315.95,826.77 345.49,797.23 v1(345.49,793.35) ; v1(845.51,1315.02) 845.7,1315.21 U14.B8@845.7,1339.34
  Bottom Layer w5: v1(345.49,793.35) 345.49,792.04 387.53,750 395.03,750 410.03,750 410.03,736.38 425.03,736.38 425.03,750 425.03,774.45 440.03,774.45 440.03,750 440.03,736.38 455.03,736.38 455.03,750 455.03,774.45 470.03,774.45 470.03,750 470.03,736.38 485.03,736.38 485.03,750 485.03,774.45 500.03,774.45 500.03,750 500.03,736.38 515.03,736.38 515.03,750 523.62,750 535.43,750 588.58,803.15 588.58,871.06 741.14,1023.62 741.14,1065.64 ; 741.12,1065.66 741.12,1079.2 762.8,1100.88 762.8,1163.17 781.14,1181.51 781.14,1189.86 790.22,1198.94 796.62,1198.94 822.34,1224.66 822.34,1272.15 845.7,1295.51 845.7,1314.83 v1(845.51,1315.02)
Y4: CN3.29 U14.A1 | length 1282.4
  Top Layer w5: v1(143.7,811.02) 190.94,811.02 203.41,811.02 203.41,789.53 218.41,789.53 218.41,811.02 218.41,839.63 233.41,839.63 233.41,811.02 233.41,789.53 248.41,789.53 248.41,811.02 255.91,811.02 CN3.29@273.82,811.02 ; v1(645.26,1227.98) U14.A1@667.54,1205.71
  Bottom Layer w5: v1(143.7,811.02) 154.53,811.02 162.03,811.02 162.03,828.01 177.03,828.01 177.03,811.02 177.03,790.51 192.03,790.51 192.03,811.02 192.03,833.51 207.03,833.51 207.03,811.02 207.03,790.51 222.03,790.51 222.03,811.02 222.03,833.51 237.03,833.51 237.03,811.02 237.03,790.51 252.03,790.51 252.03,811.02 267.03,811.02 272.64,811.02 274.11,812.5 336.69,875.08 386.27,875.08 591.99,1080.8 594.22,1080.8 645.26,1131.84 v1(645.26,1227.98)
Y5: CN3.27 U14.C11 | length 1289.6
  Top Layer w5: CN3.27@273.82,795.28 321.64,795.28 339.49,777.42 367.97,777.42 v1(375,784.45) ; v1(918.35,1381.96) 932.87,1381.96 U14.C11@934.79,1383.88
  Bottom Layer w5: v1(375,784.45) 502.95,784.45 508.26,789.75 518.86,800.36 545.26,773.96 555.86,784.57 529.47,810.97 511.39,829.04 522,839.65 540.08,821.57 566.47,795.18 577.08,805.78 550.68,832.18 557.09,838.58 567.91,849.41 567.91,877.95 718.5,1028.54 718.5,1113.19 738.19,1132.87 738.19,1205.71 772.12,1239.64 772.12,1310.8 798.92,1337.6 906.25,1337.6 918.35,1349.7 v1(918.35,1381.96)
Y6: CN3.25 U14.B1 | length 1332.8
  Top Layer w5: v1(143.7,780.51) 144.68,779.53 CN3.25@273.82,779.53 ; v1(667.53,1161.17) U14.B1@689.81,1183.44
  Bottom Layer w5: v1(143.7,780.51) 155.51,780.51 163.01,780.51 178.01,780.51 178.01,725.61 193.01,725.61 193.01,780.51 208.01,780.51 208.01,725.61 223.01,725.61 223.01,780.51 238.01,780.51 238.01,725.61 253.01,725.61 253.01,780.51 268.01,780.51 268.01,725.61 283.01,725.61 283.01,780.51 292.32,780.51 319.4,780.51 329.99,791.1 329.99,826.51 348.96,845.47 380.91,845.47 527.81,992.37 548.74,992.37 667.53,1111.17 v1(667.53,1161.17)
Y7: CN3.23 U14.B2 | length 1292.6
  Top Layer w5: CN3.23@273.82,763.78 342.25,763.78 345.9,767.42 402.27,767.42 430.14,795.3 v1(430.14,800.24) ; U14.B2@712.08,1205.71 712.08,1215.45 v1(712.08,1223.45)
  Bottom Layer w5: v1(430.14,800.24) 438.48,808.57 443.78,813.88 438.06,819.59 448.67,830.2 454.39,824.48 473.54,805.33 484.15,815.93 464.99,835.09 459.28,840.8 469.88,851.41 475.6,845.7 494.75,826.54 505.36,837.15 486.2,856.3 480.49,862.02 491.09,872.62 496.81,866.91 515.97,847.75 526.57,858.36 507.42,877.51 501.7,883.23 512.31,893.84 518.02,888.12 537.18,868.97 547.79,879.57 528.63,898.73 522.91,904.44 533.52,915.05 539.24,909.33 558.39,890.18 569,900.79 549.84,919.94 544.13,925.66 554.73,936.26 560.45,930.55 579.61,911.39 590.21,922 571.06,941.15 578.24,948.34 626.95,997.05 662.4,997.05 678.15,1012.8 681.99,1016.63 658.55,1040.07 669.15,1050.68 692.59,1027.24 703.2,1037.85 708.5,1043.15 708.5,1056 689.47,1056 689.47,1071 708.5,1071 708.5,1086 708.5,1093.5 708.5,1137.02 728.19,1156.7 728.19,1207.34 v1(712.08,1223.45)
Y8: CN3.21 U14.P13 | length 1408.4
  Top Layer w5: CN3.21@273.82,748.03 348.43,748.03 v1(349.41,749.02) ; U14.P13@1224.31,1183.44 1224.31,1193.18 v1(1224.31,1201.18)
  Internal Signal 2 w5: v1(867.17,1118.16) 906.48,1157.48 961.1,1157.48 972.91,1145.67 1013.25,1145.67 1045.74,1178.15 1165.35,1178.15 1188.73,1201.52 1223.97,1201.52 v1(1224.31,1201.18)
  Bottom Layer w5: v1(349.41,749.02) 372.05,726.38 437.01,726.38 444.51,726.38 459.51,726.38 459.51,690.66 474.51,690.66 474.51,726.38 489.51,726.38 489.51,690.66 504.51,690.66 504.51,726.38 519.51,726.38 526.57,726.38 567.91,726.38 622.05,780.51 622.05,871.06 755.91,1004.92 755.91,1052.17 760.32,1056.58 763.04,1056.58 809.93,1103.47 852.47,1103.47 v1(867.17,1118.16)
Y9: CN3.19 U14.A12 | length 1492.4
  Top Layer w5: CN3.19@273.82,732.28 330.71,732.28 v1(342.52,720.47) ; v1(910.14,1427.05) 910.14,1448.31 U14.A12@912.52,1450.69
  Internal Signal 1 w5: v1(342.52,720.47) 342.79,720.47 404.28,781.97 404.28,969.02 396.65,976.64 396.65,1058.07 490.16,1151.57 530.51,1151.57 641.24,1262.3 643.47,1264.53 604.65,1303.36 615.26,1313.96 654.08,1275.14 664.68,1285.75 625.86,1324.57 636.47,1335.18 675.29,1296.35 685.9,1306.96 647.08,1345.78 657.68,1356.39 696.5,1317.57 707.11,1328.17 712.41,1333.48 741.12,1333.48 741.12,1332.92 750.2,1323.84 782.02,1323.84 791.85,1333.66 851.38,1333.66 887.85,1370.14 887.85,1410.52 904.38,1427.05 v1(910.14,1427.05)
pads on no net: CN3.3 CN3.6 CN3.10 CN3.12 CN3.14 CN3.16 CN3.18 CN3.22 CN3.24 CN3.28 CN3.30 CN10.9 CN10.22 CN10.23 D5.A2 D5.B1 D5.B2 D5.C2 STBC.F4 U2.4 U4.E3 U4.E7 U4.H3 U4.H7 U4.K2 U4.K3 U13.5 U14.A2 U14.A3 U14.A4 U14.B3 U14.B5 U14.B11 U14.C2 U14.C4 U14.C5 U14.C6 U14.C7 U14.C8 U14.C9 U14.C10 U14.D1 U14.D7 U14.D8 U14.D10 U14.D11 U14.D12 U14.E3 U14.F3 U14.F14 U14.G3 U14.G4 U14.H3 U14.J14 U14.J15 U14.K14 U14.L4 U14.L13 U14.M3 U14.M4 U14.M5 U14.M9 U14.M10 U14.M11 U14.M12 U14.M13 U14.N2 U14.N8 U14.N10 U14.P2 U14.P4 U14.R2 U14.R3 U14.R4 U14.R5 U14.R6 U14.R7 U14.R13

## Polygon pours and split planes (outlines as drawn)
AGND on Top Layer "AGND" (solid, remove dead copper, pour order 4): 0,1171.26 0,507.87 371.06,507.87 371.06,521.65 371.06,1171.26
BLGND on Top Layer "BLGND" (solid, pour order 2): 2253.94,2234.25 2280.51,2234.25 2905.51,2234.25 2905.51,2060.04 2792.32,2060.04 2792.32,1970.47 2792.32,1937.99 2737.2,1882.87 2655.51,1882.87 2655.51,2027.56 2279.53,2027.56 2253.94,2053.15
GND on GND_TOP (split plane): 3806.67,2214.15 3806.67,1707.1 3432.5,1707.1 3432.5,1742.13 3432.11,1746.05 3430.97,1749.82 3429.11,1753.29 3426.61,1756.34 3423.57,1758.84 3420.09,1760.69 3416.32,1761.84 3412.4,1762.22 2921.26,1762.22 2917.34,1761.84 2913.57,1760.69 2910.09,1758.84 2907.05,1756.34 2904.55,1753.29 2902.69,1749.82 2901.55,1746.05 2901.16,1742.13 2901.16,1707.1 1388.78,1707.1 1384.86,1706.72 1381.09,1705.57 1377.61,1703.72 1374.57,1701.22 1372.07,1698.17 1370.21,1694.7 1369.07,1690.93 1368.68,1687.01 1368.68,20.1 1363.6,20.1 1363.6,66.93 1363.21,70.85 1362.07,74.62 1360.21,78.09 1357.71,81.14 1354.67,83.64 1351.19,85.5 1347.42,86.64 1343.5,87.03 1207.68,87.03 1203.76,86.64 1199.99,85.5 1196.51,83.64 1193.47,81.14 1190.97,78.09 1189.11,74.62 1187.97,70.85 1187.58,66.93 1187.58,20.1 1113.19,20.1 391.16,20.1 391.16,507.87 390.77,511.79 389.63,515.56 387.77,519.04 385.27,522.08 382.23,524.58 378.75,526.44 374.98,527.58 371.06,527.97 20.1,527.97 20.1,1151.16 511.81,1151.16 515.73,1151.55 519.5,1152.69 522.98,1154.55 526.02,1157.05 528.52,1160.09 530.38,1163.57 531.52,1167.34 531.91,1171.26 531.91,1603.35 531.52,1607.27 530.38,1611.04 528.52,1614.51 526.02,1617.56 522.98,1620.06 519.5,1621.91 515.73,1623.06 511.81,1623.44 20.1,1623.44 20.1,2214.16
+3V3 on VCC (split plane): 3806.67,2214.15 3806.67,1707.1 3432.5,1707.1 3432.5,1742.13 3432.11,1746.05 3430.97,1749.82 3429.11,1753.29 3426.61,1756.34 3423.57,1758.84 3420.09,1760.69 3416.32,1761.84 3412.4,1762.22 2921.26,1762.22 2917.34,1761.84 2913.57,1760.69 2910.09,1758.84 2907.05,1756.34 2904.55,1753.29 2902.69,1749.82 2901.55,1746.05 2901.16,1742.13 2901.16,1707.1 1388.78,1707.1 1384.86,1706.72 1381.09,1705.57 1377.61,1703.72 1374.57,1701.22 1372.07,1698.17 1370.21,1694.7 1369.07,1690.93 1368.68,1687.01 1368.68,20.1 1363.6,20.1 1363.6,66.93 1363.21,70.85 1362.07,74.62 1360.21,78.09 1357.71,81.14 1354.67,83.64 1351.19,85.5 1347.42,86.64 1343.5,87.03 1207.68,87.03 1203.76,86.64 1199.99,85.5 1196.51,83.64 1193.47,81.14 1190.97,78.09 1189.11,74.62 1187.97,70.85 1187.58,66.93 1187.58,20.1 1113.19,20.1 391.16,20.1 391.16,507.87 390.77,511.79 389.63,515.56 387.77,519.04 385.27,522.08 382.23,524.58 378.75,526.44 374.98,527.58 371.06,527.97 20.1,527.97 20.1,1151.16 511.81,1151.16 515.73,1151.55 519.5,1152.69 522.98,1154.55 526.02,1157.05 528.52,1160.09 530.38,1163.57 531.52,1167.34 531.91,1171.26 531.91,1603.35 531.52,1607.27 530.38,1611.04 528.52,1614.51 526.02,1617.56 522.98,1620.06 519.5,1621.91 515.73,1623.06 511.81,1623.44 20.1,1623.44 20.1,2214.16

## Silkscreen, mask and mechanical layers (free items; w line width, h text height)
Mechanical 1:
  lines w0.98: 0,2234.25 237,2234.25 ; 24.61,740.16 191.93,740.16 359.25,740.16 ; 237,1651.13 237,2234.25 ; 359.25,0.98 359.25,965.55 ; 453.5,2234.25 237,2234.25 ; 453.54,1651.13 453.54,2234.25
Mechanical 13:
  lines w0.98: 0,1171.26 511.81,1171.26 ; 0,1603.35 511.81,1603.35 ; 18.7,1604.25 18.7,2234.25

## Text inside footprints (layer, text, board x,y; h text height)
CN10: Top Overlay "1" at 2931.1,1985.24 h59.06; Top Overlay "24" at 3350.39,1985.24 h59.06